# EAGLE board seaturtle (EAGLE 6.2)
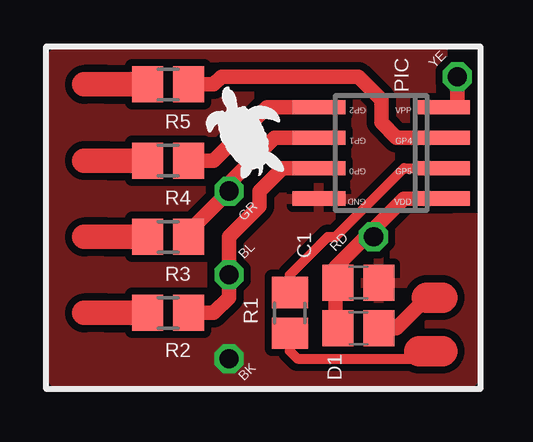
[diagram p0: board, top side]

No outline drawn. Coordinates in mm, seen from the top.
Copper layers (1*16): Top 0.035mm / dielectric 1.5mm / Bottom 0.035mm
Design rules: minimum track width 10mil, minimum drill 24mil, track to track 12mil, track to pad 12mil, pad to pad 8mil, via to via 8mil, smd to smd 8mil, copper to edge 40mil, drill to drill 8mil, minimum pad ring 10mil, minimum via ring 8mil, stop-mask expansion 4mil, vias tented up to drill 0mil, thermal gap 10mil

## Footprints (pad centres in the part's own frame; a part is rotated, then mirrored left to right if it is on the bottom)
C0805 = smd 1.3 x 1.5: 1 -0.85,0; 2 0.85,0
SO-08 = smd 0.6 x 2.2: 1 -1.905,-2.6; 2 -0.635,-2.6; 3 0.635,-2.6; 4 1.905,-2.6; 5 1.905,2.6; 6 0.635,2.6; 7 -0.635,2.6; 8 -1.905,2.6
R0805 = smd 1.3 x 1.5: 1 -0.85,0; 2 0.85,0

## Placement (x,y rotation side)
C1  [C0805]  13.02,4.45 0 top
D1  [C0805]  13.02,2.54 0 top
PIC  [SO-08]  13.97,9.84 90 top
R1  [R0805]  10.16,3.17 270 top
R2  [R0805]  5.08,3.17 0 top
R3  [R0805]  5.08,6.35 0 top
R4  [R0805]  5.08,9.53 0 top
R5  [R0805]  5.08,12.7 0 top

## Library data of the parts
C1 D1 R1-R5 = resistor
PIC = microchip

## Nets
GND: C1.2 PIC.8

## Tracks (layer width: path | path; a pad name or v marks a point on that pad's centre or on a via)
5V  (via drill 0.8)
  Top 0.61: 12.06,2.54 12.06,5.08 13.34,6.35 | 13.34,6.35 14.92,7.94 16.83,7.94 | v13.65,6.35 13.34,6.35
5V_IN
  Top 0.61: 15.88,3.81 14.61,2.54 13.97,2.54
  Top 1.27: 16.51,3.81 15.88,3.81
AUX_OUT
  Top 0.61: 6.03,12.7 6.99,12.7 7.3,13.02 13.02,13.02 13.97,12.06 13.97,11.11 14.61,10.48 16.83,10.48
GND  (via drill 0.8)
  other vias: 7.62,1.27
  pour Top: 17.78,0.32 0.32,0.32 0.32,13.97 17.78,13.97
HEAD_OUT
  Top 0.61: 10.79,11.75 9.21,11.75 6.99,9.53 6.03,9.53
REV_OUT  (via drill 0.8)
  Top 0.61: 6.03,6.67 v7.62,8.26 7.62,8.57 9.53,10.48 11.75,10.48
RX
  Top 0.406: 16.19,9.21 14.92,9.21 12.06,6.35 11.75,6.35 10.16,4.76 10.16,4.13
RX_IN
  Top 0.406: 10.16,2.22 10.16,1.59 10.48,1.27 15.24,1.27 15.56,1.59
  Top 1.27: 16.51,1.59 15.56,1.59
S$3
  Top 1.016: 1.59,3.17 2.54,3.17 4.13,3.17
S$4
  Top 1.016: 1.59,6.35 2.54,6.35 4.13,6.35
S$5
  Top 1.016: 1.59,9.53 2.54,9.53 4.13,9.53
S$6
  Top 1.016: 1.59,12.7 2.54,12.7 3.81,12.7
TAIL_OUT  (via drill 0.8)
  Top 0.61: 6.03,3.17 6.99,3.17 7.62,3.81 v7.62,4.76 7.62,6.35 8.89,7.62 8.89,8.26 9.84,9.21 11.75,9.21
VPP  (via drill 0.8)
  Top 0.61: 17.14,11.75 v17.14,13.02

## Text on the board
tNames: YE | GP2 | VPP | GP1 | GP4 | GP0 | GP5 | GND | VDD | GR | RD | BL | BK